# Altium PCB mixer_30mil_1GHz.PcbDoc
Units mm, origin at the board's own origin, x right, y up, seen from the top; angles counter-clockwise.
Board outline 35 x 35 mm, 2 copper layers (Top Layer, Bottom Layer); 24 components, 12 nets, 63 pads, 34 vias.
Unrouted connection lines stored in the file: 3.
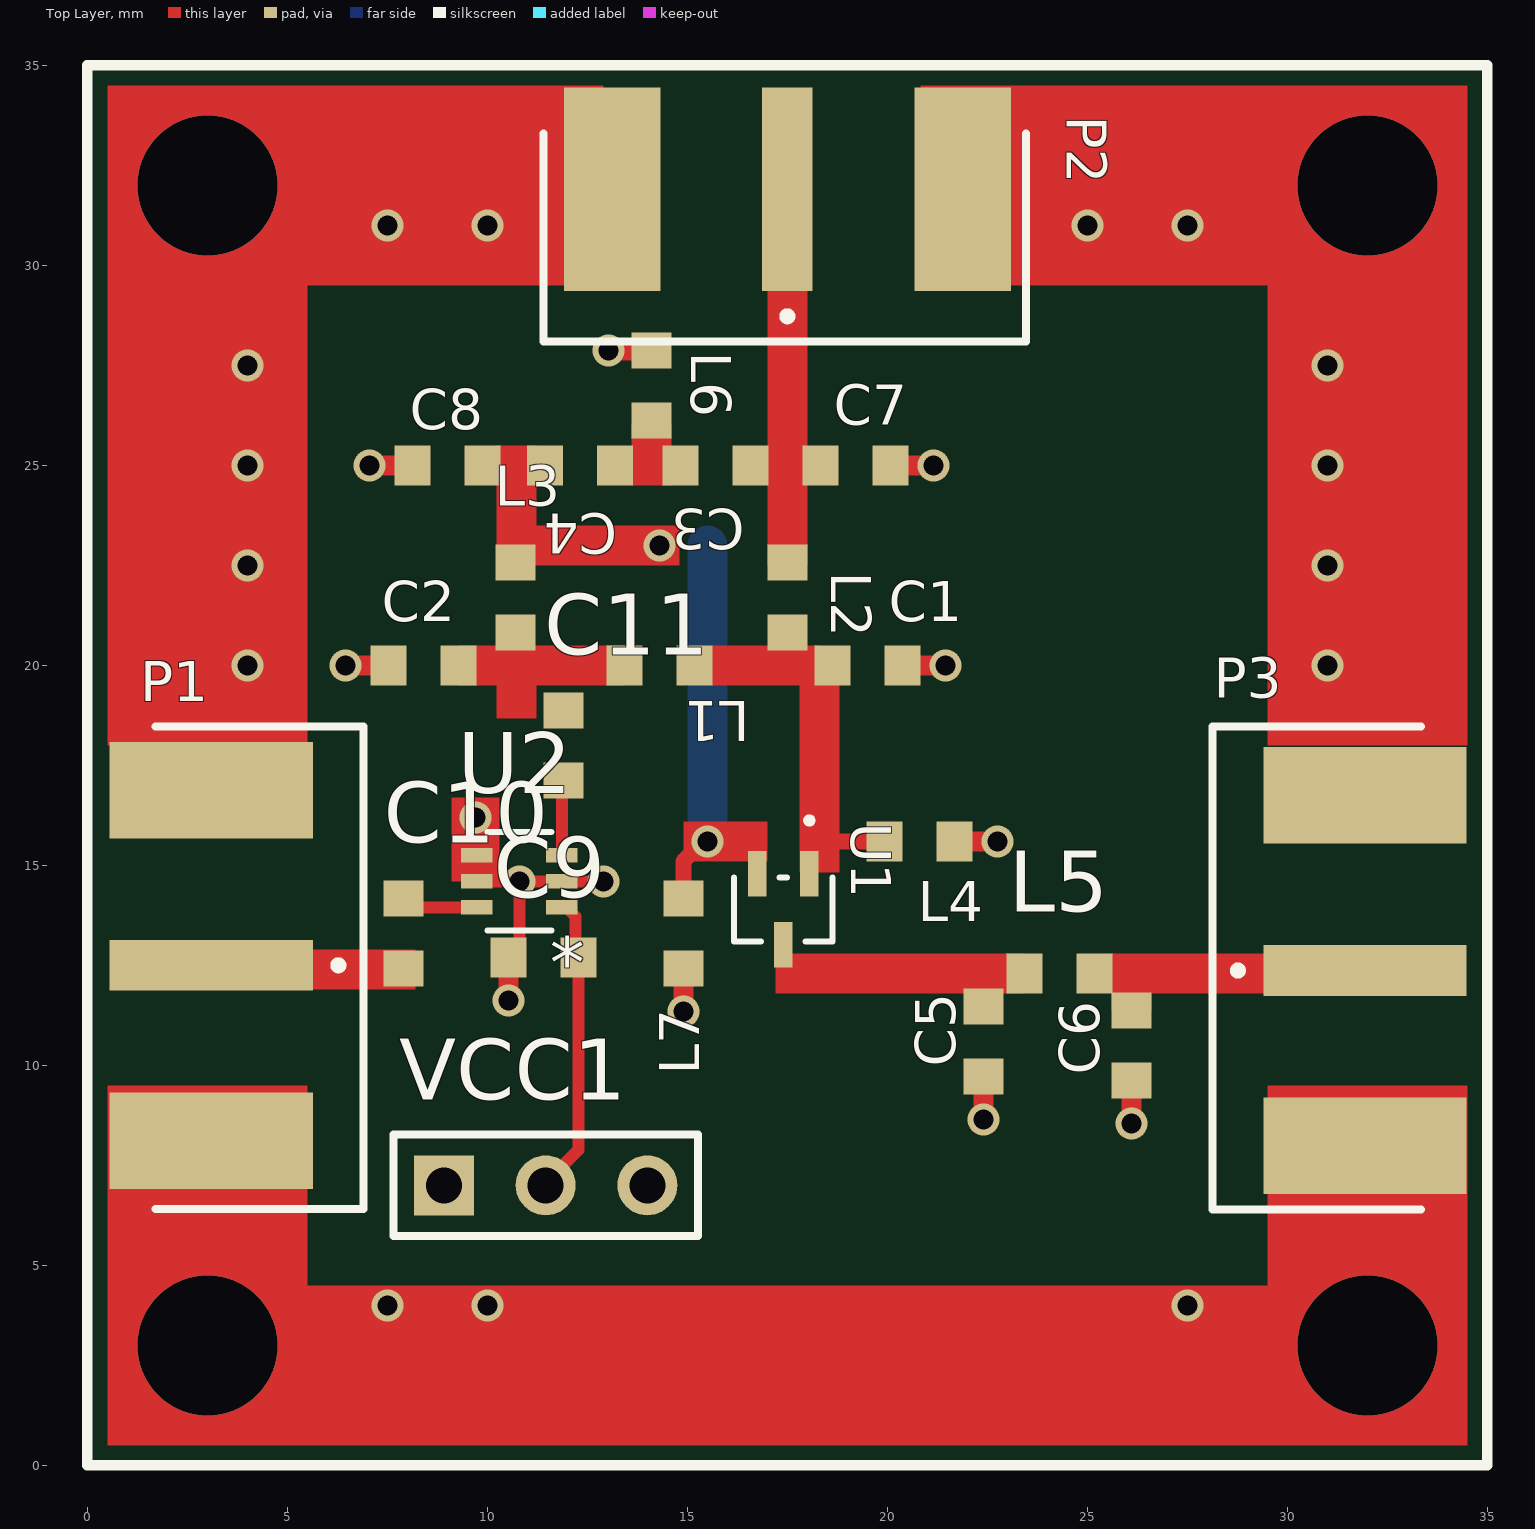
[diagram p0: Top Layer view]
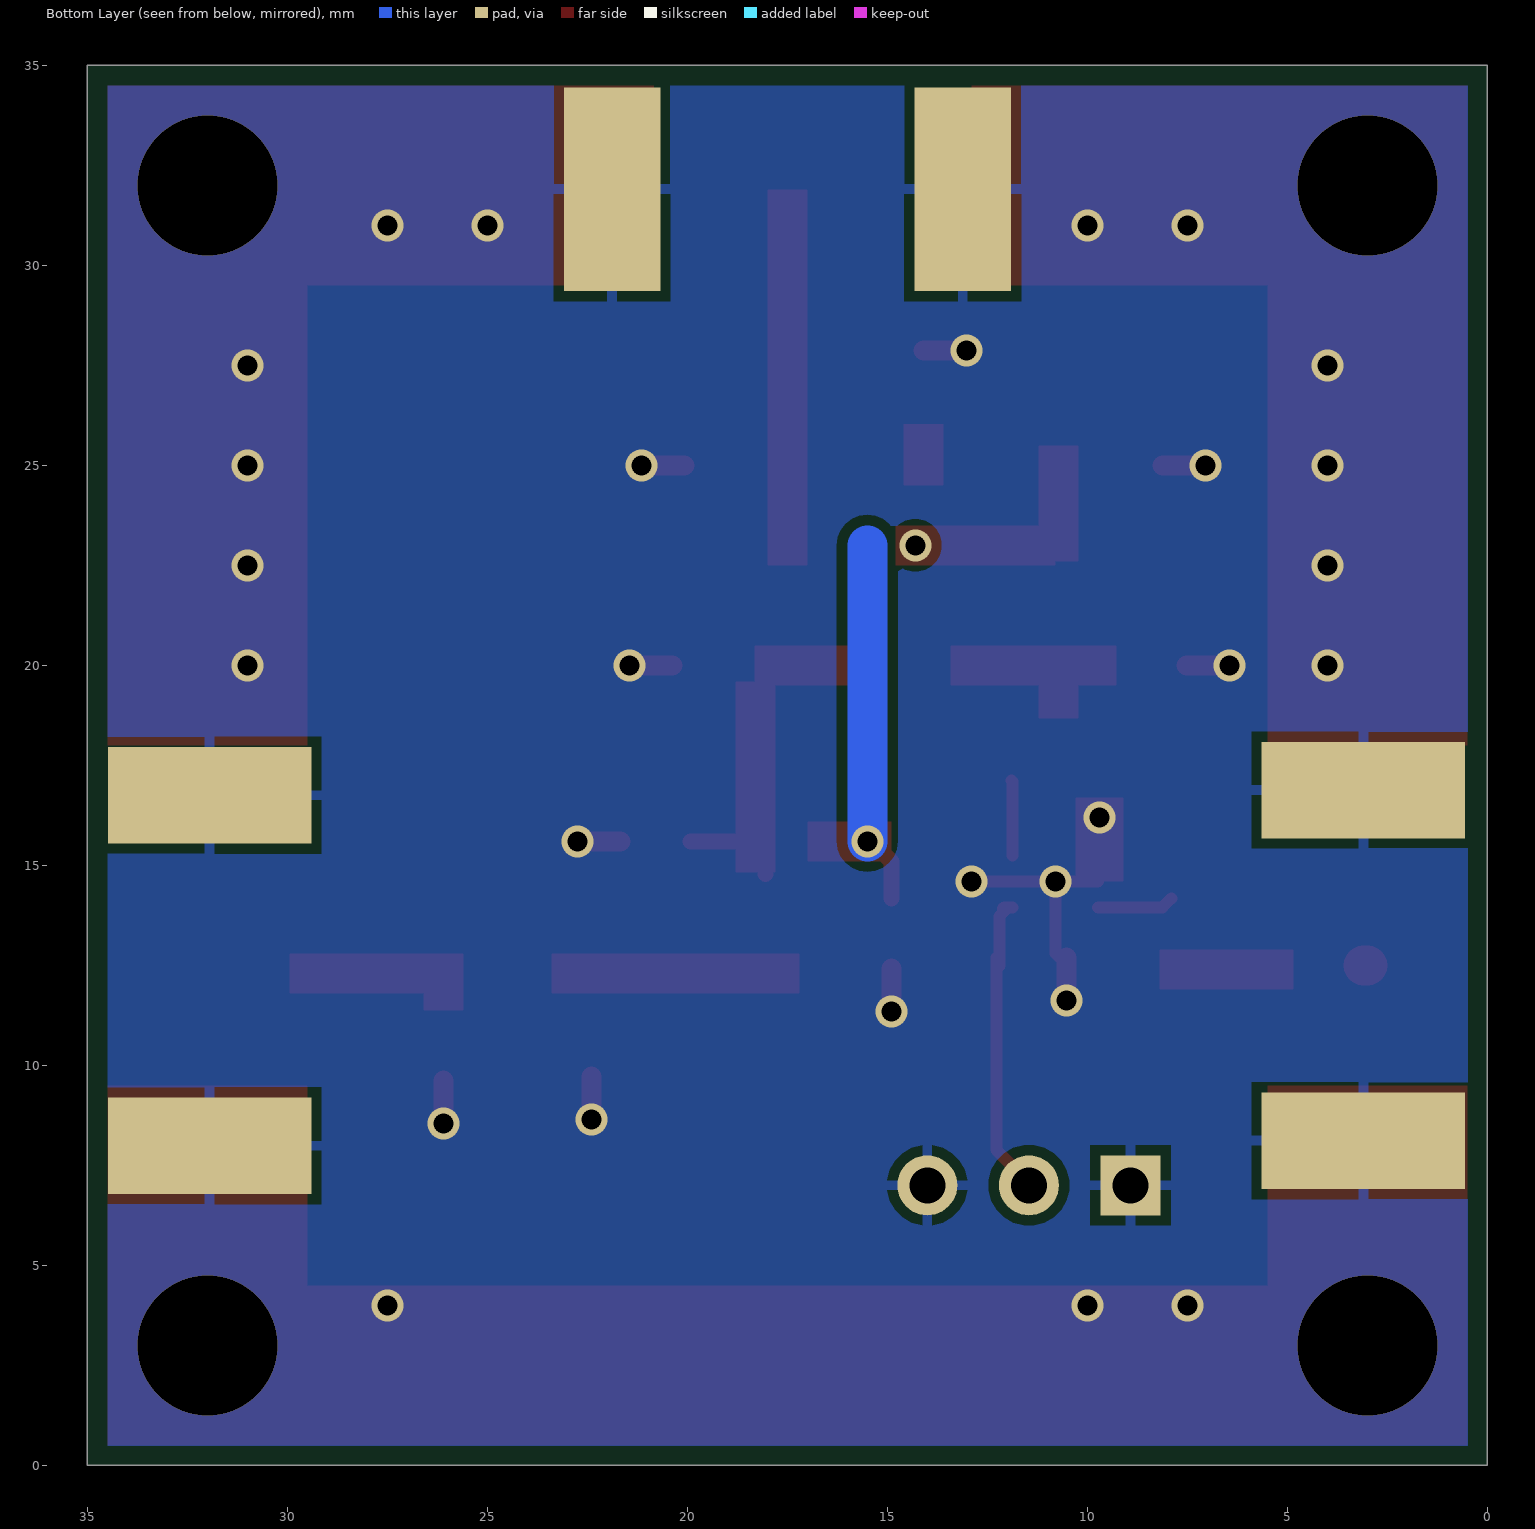
[diagram p1: Bottom Layer view, seen from below]
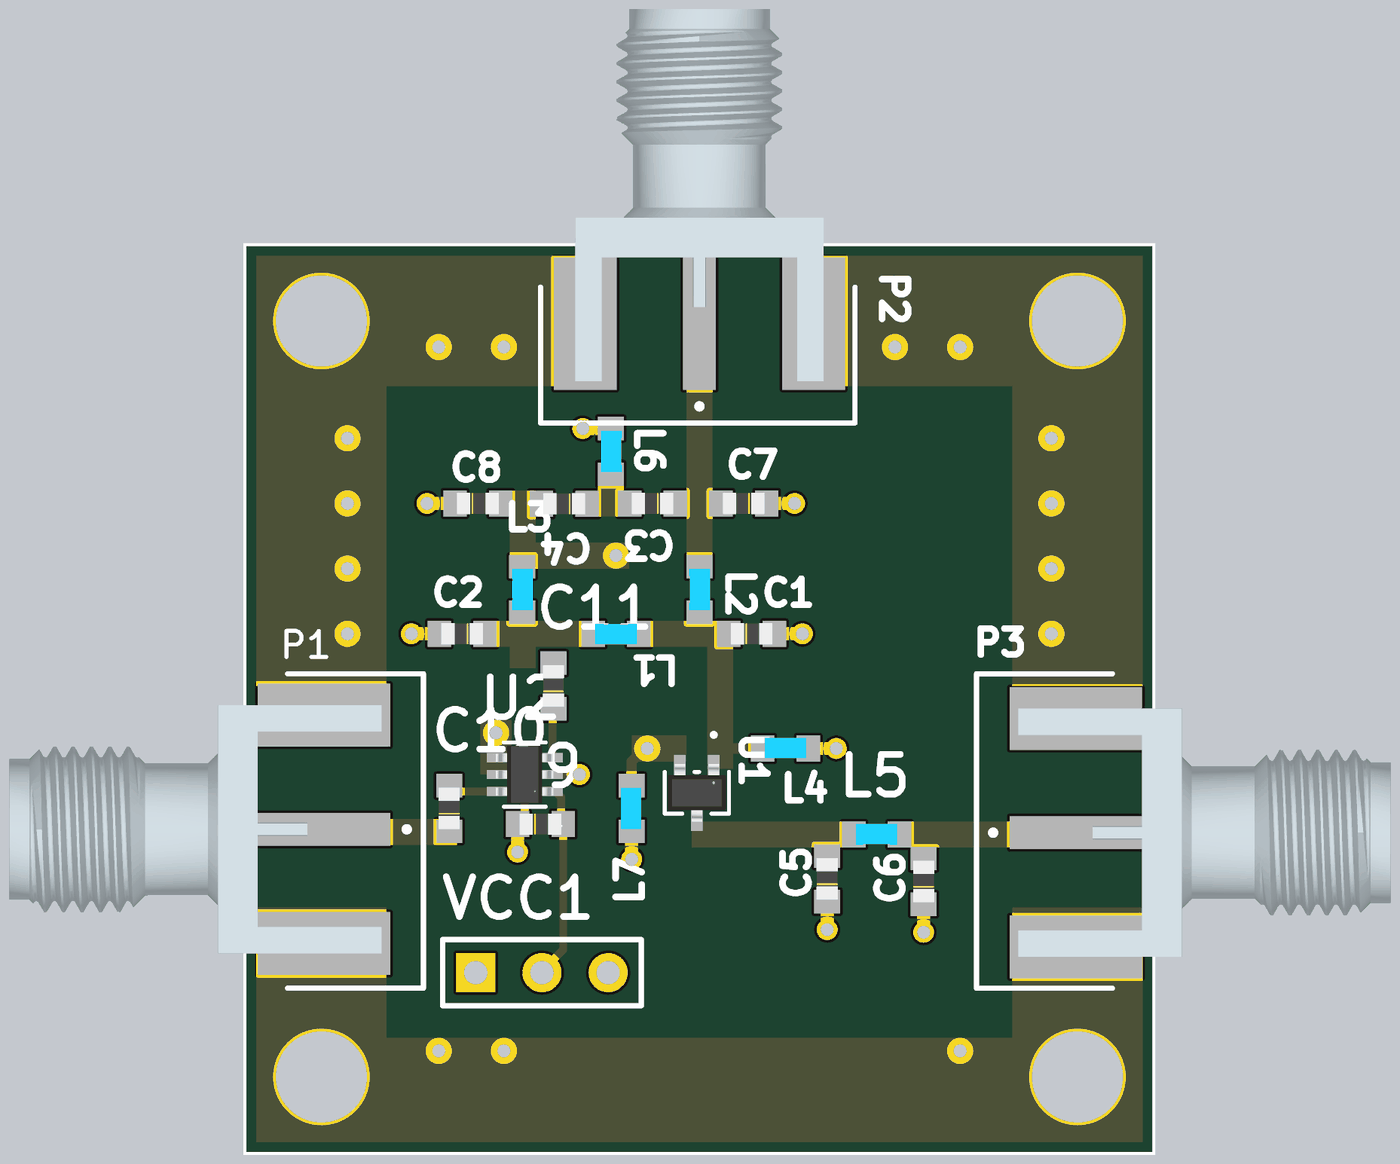
[diagram p2: 3D render of the assembled board from above, using the file's embedded part models]

## Layer stack, top to bottom
Top Solder: solder mask 0.0102, Solder Resist, Dk 3.5
Top Layer: signal copper 0.0356
Dielectric 1: dielectric 0.32, FR-4, Dk 4.8
Bottom Layer: signal copper 0.0356
Bottom Solder: solder mask 0.0102, Solder Resist, Dk 3.5

## Board outline
0,0 0,35 35,35 35,0

## Design rules (kind name [scope] priority, off if disabled: settings)
Clearance [All] p1: gap=0.254 ignorepadtopadclearanceinfootprint=FALSE except(0: Arc-Hole Track-Hole SMDPad-Hole THPad-Hole Via-Hole Fill-Hole Poly-Hole Region-Hole Text-Hole)
ComponentClearance [All] p1: gap=0.01 collisioncheckmode=3 verticalgap=2540 showdistances=TRUE donotcheckwithout3dbody=TRUE
MinimumSolderMaskSliver [All] p1: minsoldermaskwidth=0.152
PolygonConnect PolygonConnect_via [IsVia vs IsPolygon] p1: connectstyle=Direct reliefconductorwidth=0.254 reliefentries=4 polygonreliefangle="90 Angle" airgapwidth=0.254
PolygonConnect [All] p2: connectstyle=Relief reliefconductorwidth=0.254 reliefentries=4 polygonreliefangle="90 Angle" airgapwidth=0.254
RoomDefinition mixer_1GHz_rat_race_discreto [InComponentClass('mixer_1GHz_rat_race_discreto')] p1: confinementstyle=ConfineIn formatcopy=TRUE lockcomponents=FALSE outline -119.867,-44.61 94.8,-44.61 94.8,110.01 -119.867,110.01
RoutingVias [All] p1: holewidth=0.711 width=1.27 viastyle="Through Hole" minholewidth=0.711 minwidth=1.27 maxholewidth=0.711 maxwidth=1.27
SilkToSilkClearance [All] p1: silktosilkclearance=0.152
SilkToSolderMaskClearance [IsPad] p1: minsilkscreentomaskgap=0.152 clearancetoexposedcopper=TRUE
SolderMaskExpansion [All] p1: expansion=0.102 istentingtop=FALSE
Width [All] p1: maxlimit=2.54 minlimit=0.254 preferedwidth=0.254
26 further rules are at their usual default settings.

## Components (designator, comment, footprint, x,y, rotation, side; value= is the part's Value field where it differs from the comment)
C1 "Cap 0603" CAPC1608X90N 19.5,20 r0 top value=0.6pF
C2 "Cap 0603" CAPC1608X90N 8.4,20 r180 top value=0.6pF
C3 "Cap 0603" CAPC1608X90N 15.7,25 r180 top value=0.6pF
C4 "Cap 0603" CAPC1608X90N 12.315,24.99 r180 top value=0.6pF
C5 "Cap 0603" CAPC1608X90N 22.4,10.6 r90 top value=0.6pF
C6 "Cap 0603" CAPC1608X90N 26.1,10.5 r90 top value=0.6pF
C7 "Cap 0603" CAPC1608X90N 19.2,25 r180 top value=0.6pF
C8 "Cap 0603" CAPC1608X90N 9,25 r0 top value=0.6pF
C9 "Cap 0603" CAPC1608X90N 11.4,12.7 r0 top value=0.6pF
C10 "Cap 0603" CAPC1608X90N 7.9,13.3 r90 top value=0.6pF
C11 "Cap 0603" CAPC1608X90N 11.9,18 r90 top value=0.6pF
L1 "LQW18" INDC1608X100N 14.3,20 r180 top value=1nHy
L2 "LQW18" INDC1608X100N 17.5,21.7 r270 top value=1nHy
L3 "LQW18" INDC1608X100N 10.7,21.7 r270 top value=1nHy
L4 "LQW18" INDC1608X100N 20.8,15.6 r0 top value=1nHy
L5 "LQW18" INDC1608X100N 24.3,12.3 r0 top value=1nHy
L6 "LQW18" INDC1608X100N 14.1,27 r270 top value=1nHy
L7 "LQW18" INDC1608X100N 14.9,13.3 r90 top value=1nHy
P1 "SMA" SMA-142-0701-851_V2 3.1,12.5 r270 top
P2 "SMA" SMA-142-0701-851_V2 17.5,31.9 r180 top
P3 "SMA" SMA-142-0701-851_V2 31.94,12.37 r90 top
U1 "BAT1504W" SOT_327XTSA1_INF 17.4,13.9 r180 top
U2 "BGA2866,115" SOT363_NXP 10.8,14.6 r180 top
VCC1 "Header 3" HDR1X3 8.92,7 r0 top

## Footprints (in the part's own frame and the unit in brackets; to place one, negate y for a bottom-side part, rotate by r counter-clockwise, add the part's x,y. Pads: shape width x height; smd on the part's side, far side on the other; paste and mask are expansions set on the pad)
CAPC1608X90N [mm]
  rect 0.9x1 smd: 1(-0.875,0) 2(0.875,0)
  body extent -0.8,-0.41 0.8,0.41, height 0.89
HDR1X3 [mm] "Connector; Header; 3 Position"
  rect 1.5x1.5 hole 0.9: 1(0,0)
  round 1.5 hole 0.9: 2(2.54,0) 3(5.08,0)
  silkscreen extent -1.27,-1.27 6.35,1.27
INDC1608X100N [mm] "Inductor LQW0603"
  rect 0.9x1 smd: 1(-0.875,0) 2(0.875,0)
  body extent -0.8,-0.38 0.8,0.42, height 1
SMA-142-0701-851_V2 [mil] "SMA 50 Ohm, End Launch Jack Receptacle, Tab Contact"
  rect 50x200 smd: 1(0,0)
  rect 95x200 smd: 2(-172.5,0) 2(172.5,0)
  rect 95x200 smd far side: 2(-172.5,0) 2(172.5,0)
  silkscreen extent -235,-55 240,150, body extent -187,-475 188,87, height 161
SOT363_NXP [mil]
  rect 31x14 smd paste+0 mask+0: 1(-42,25.59) 2(-42,0) 3(-42,-25.59) 4(42,-25.59) 5(42,0) 6(42,25.59)
  silkscreen extent -32,-49 32,49, body extent -44,-44 44,44, height 43
SOT_327XTSA1_INF [mil]
  rect 18x45 smd paste+0 mask+0: 1(-25.59,-35) 2(25.59,-35) 3(0,35)
  silkscreen extent -49,-90 49,32, body extent -44,-44 44,44, height 39

## Part data
C1 C2 C3 C4 C5 C6 C7 C8 C9 C10 C11: library part Cap, "Capacitor GRM18 0603", LatestRevisionDate=17-Jul-2002, LatestRevisionNote="Re-released for DXP Platform.", PackageDescription="Polarized Capacitor; 2 Leads", PackageReference=POLAR0.8, Published=8-Jun-2000, Publisher="Altium Limited", Supplier 1=Mouser
L1 L2 L3 L4 L5 L6 L7: "Ind RF Chip Wirewound 18nH 5% 100MHz 40Q-Factor 550mA 0603 Paper T/R", Package=None, Availability=Unavailable, MP=LQW18AN18NJ00D, Parameter 1=LQW0603, Price=None
P1 P2 P3: library part SMB, "SMB Straight Connector", LatestRevisionDate=17-Jul-2002, LatestRevisionNote="Re-released for DXP Platform.", Publisher="Altium Limited"
U1: "Diodo", Mfr_Name=Infineon, RefDes=RefDes, Type=Type
U2: "No Description Available", Mfr_Name=NXP, RefDes=RefDes, Type=Type
VCC1: "Header, 3-Pin", LatestRevisionDate=17-Jul-2002, LatestRevisionNote="Re-released for DXP Platform.", Publisher="Altium Limited"

## Via types
v1: diameter 0.8, hole 0.5, Top Layer to Bottom Layer, 30 vias
v2: diameter 3.5, hole 3.5, Top Layer to Bottom Layer, 4 vias

## Nets (pads, with @x,y where several pads share a name; then routed paths per layer and width w, separated by ;. In a path a pad name is that pad's centre, name@x,y a point inside that pad or via, vN(x,y) a via of type N, cw(c..) or ccw(c..) an arc to the next point about the centre after c; other vN are vias at no path point)
GND: C1.2 C2.2 C5.1 C6.1 C7.1 C8.1 C9.1 L4.2 L6.1 L7.1 P1.2 P2.2 P3.2 U2.2 U2.4 U2.5 VCC1.1 VCC1.3 | length 16
  Top Layer w0.3: U2.5 v1(10.8,14.6) ; C9.1@10.6,12.6 10.8,12.8 v1(10.8,14.6) ; v1(12.9,14.6) U2.2 v1(10.8,14.6)
  Top Layer w0.5: v1(6.45,20) C2.2 ; v1(7.05,25) C8.1 ; v1(10.525,11.625) C9.1 ; v1(13.025,27.875) L6.1 ; v1(14.9,11.35) L7.1 ; C7.1 v1(21.15,25) ; C1.2 v1(21.45,20) ; L4.2 v1(22.75,15.6) ; v1(22.4,8.65) C5.1 ; v1(26.1,8.55) C6.1
  other v1: 7.5,4 10,4 27.5,4 9.7,16.2 4,20 31,20 4,22.5 31,22.5 4,25 31,25 4,27.5 31,27.5 7.5,31 10,31 25,31 27.5,31
  other v2: 3,3 32,3 3,32 32,32
NetC2_1: C2.1 C11.2 L1.2 L3.2
NetC3_1: C3.1 C7.2 L2.1 P2.1
NetC3_2: C3.2 C4.1 L6.2
NetC5_2: C5.2 L5.1 U1.3
NetC6_2: C6.2 L5.2 P3.1
NetC9_2: C9.2 U2.1 VCC1.2 | length 8.9
  Top Layer w0.3: VCC1.2 11.46,7.067 12.275,7.882 12.275,12.481 C9.2 ; U2.1 U2.1@11.975,13.95 ; U2.1@12.111,13.922 12.083,13.95 U2.1@11.975,13.95 ; C9.2@12.2,12.481 12.2,13.725 ; C9.2@12.2,12.7 12.2,13.725 ; U2.1@11.975,13.95 12.2,13.725
NetC10_1: C10.1 P1.1 | length 0.1
  Top Layer w1: P1.1@3,12.5 P1.1
NetC10_2: C10.2 U2.6 | length 1.9
  Top Layer w0.3: C10.2 8.125,13.95 U2.6
NetC11_1: C11.1 U2.3 | length 1.9
  Top Layer w0.3: U2.3 11.867,17.092 C11.1
p3: C1.1 L1.1 L2.2 L4.1 U1.1 | length 2.4
  Top Layer w0.4: U1.1 18.05,15.132 18.518,15.6 L4.1
p4: C4.2 C8.2 L3.1 L7.2 U1.2 | length 9.1
  Top Layer w0.4: L7.2 14.9,15.1 15.4,15.6 v1(15.5,15.6)
  Bottom Layer w1: v1(15.5,15.6) 15.5,23
  other v1: 14.3,23

## Polygon pours and split planes (outlines as drawn)
GND on Bottom Layer "GND_L02_P000" (solid, pour order 0): 0.49,0.49 0.49,34.49 34.49,34.49 34.49,0.49

## Other copper
Top Layer:
  region net GND: 10.3,14.6 10.3,16.7 9.1,16.7 9.1,14.6
  region net NetC10_1: 8.2,12.9 4.84,12.9 4.84,11.9 8.2,11.9
  rectangle net p4: 10.8,22.5 14.8,23.5
  region net p4: 17,16.1 14.9,16.1 14.9,15.1 17,15.1
  region net p3: 18.8,14.825 18.8,19.6 17.8,19.6 17.8,14.825
  rectangle net p3: 15.2,19.5 18.325,20.5
  region net NetC5_2: 23.4,12.8 17.2,12.8 17.2,11.8 23.4,11.8
  region net NetC6_2: 25.6,12.8 25.6,11.375 26.6,11.375 26.6,12.8
  region net NetC3_1: 17,31.9 17,22.5 18,22.5 18,31.9
  region net NetC2_1: 11.225,18.675 11.225,20.015 10.225,20.015 10.225,18.675
  region net p3: 39.801,25.95 39.801,28.1 38.801,28.1 38.801,25.95
  region net p4: 10.225,25.5 10.225,22.6 11.225,22.6 11.225,25.5
  rectangle net NetC2_1: 9.275,19.5 13.425,20.5
  region net NetC3_2: 14.6,24.5 14.6,26.03 13.6,26.03 13.6,24.5
  rectangle net GND: 20.83,29.5 34.5,34.5
  rectangle net GND: 0.5,29.5 12.9,34.5
  rectangle net GND: 0.5,18 5.5,34.5
  rectangle net GND: 29.5,18 34.5,34.5
  region net GND: 30.5,4.5 0.7,4.5 0.7,0.5 30.5,0.5
  region net GND: 5.5,9.5 0.5,9.5 0.5,0.5 5.5,0.5
  region net GND: 34.5,9.5 29.5,9.5 29.5,0.5 34.5,0.5
  rectangle net NetC6_2: 26.1,11.8 29.95,12.8

## Silkscreen, mask and mechanical layers (free items; w line width, h text height)
Top Overlay:
  the board outline again, w0.254

## Dimensions
35,35 to 35,0 on Top Overlay
0,0 to 35,0 on Top Overlay

## Text inside footprints (layer, text, board x,y; h text height)
P1: Mechanical 13 "PCB EDGE" at 0.814,5.896 h1
P2: Mechanical 13 "PCB EDGE" at 10.8,43.6 h1 r270
P3: Mechanical 13 "PCB EDGE" at 34.226,18.974 h1 r180
U2: Mechanical 13 "*" at 11.41,14.841 h1.27 r180; Top Overlay "*" at 12.438,13.721 h1.27 r180